# EAGLE board chaprintesting14viasben (EAGLE 6.4)
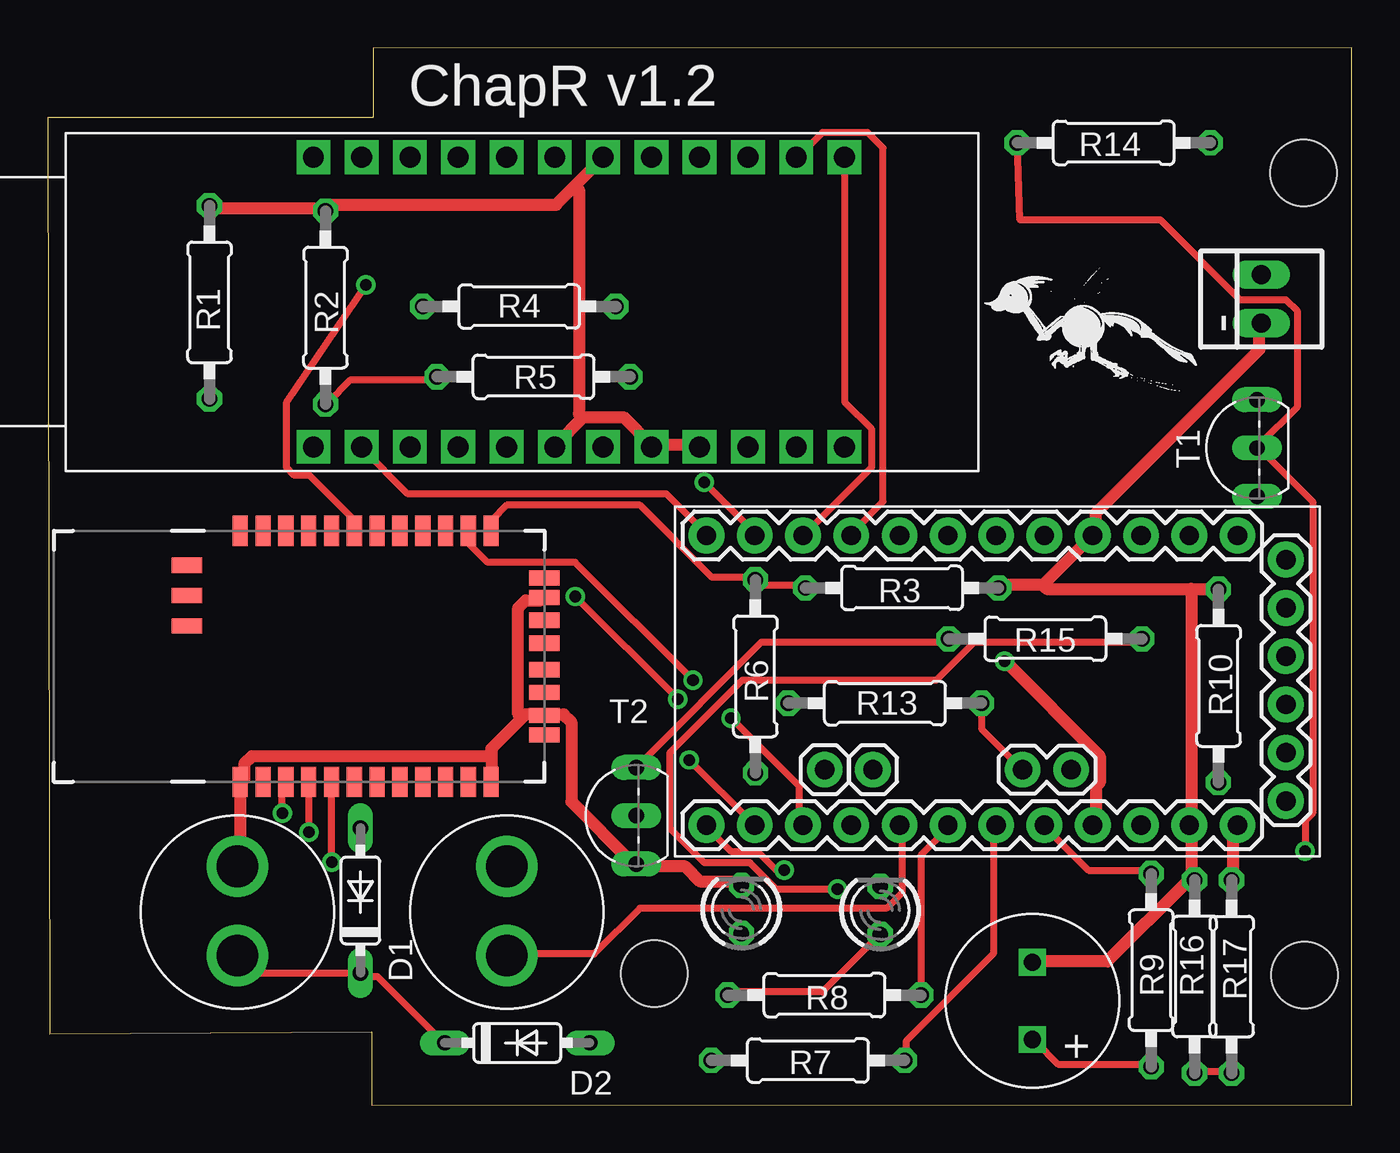
[diagram p0: board, top side]
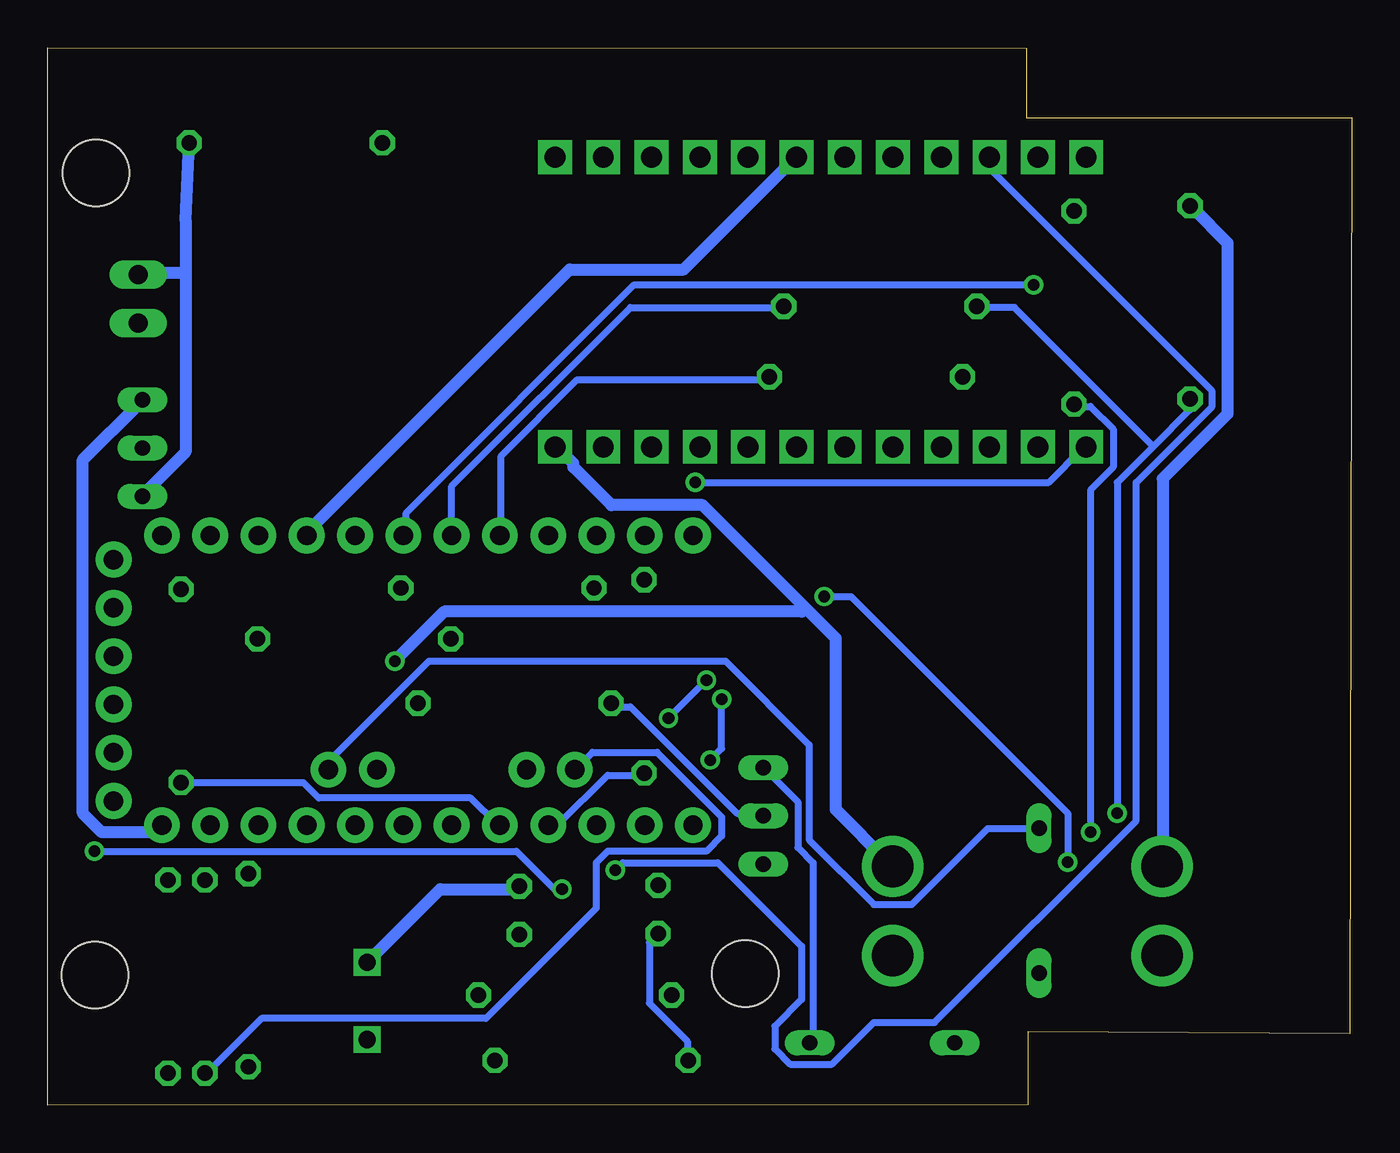
[diagram p1: board, bottom side, seen from below]

Size 68.61 x 55.65 mm. Coordinates in mm from the lower left corner, seen from the top.
Outline: 0.11,3.78 17.05,3.86 17.05,0.03 68.61,0 68.61,55.65 17.13,55.6 17.13,51.97 0,51.97 0.11,3.78
Copper layers (1*16): Top 0.035mm / dielectric 1.5mm / Bottom 0.035mm
Design rules "default *": minimum track width 10mil, minimum drill 24mil, track to track 8mil, track to pad 8mil, pad to pad 8mil, via to via 9mil, smd to smd 9mil, copper to edge 40mil, drill to drill 8mil, minimum pad ring 10mil, minimum via ring 8mil, stop-mask expansion 4mil, vias tented up to drill 0mil, thermal gap 10mil
Net classes: 0 default: width 0.381 mm; 1 GND: width 0.635 mm; 2 Supply: width 0.635 mm; 3 Main Supply: width 0.635 mm
Holes 3.5 mm at 66.07,49.05 66.11,6.84 31.92,6.94
tRestrict: area 24.3,16 to 26.8,18.5; area -0.7,15.9 to 9.5,31.2; area 30,4.9 to 34,8.9; area 64.1,4.8 to 68.1,8.8; area 64.2,47.1 to 68.2,51.1; area 24.8,28.9 to 26.5,30.7
bRestrict: area 24.3,16 to 26.8,18.5; area -0.7,16 to 9.5,31.3; area 64,4.8 to 68.2,8.8; area 64.2,47.2 to 68.3,51.1; area 29.9,5 to 34,8.9
vRestrict: area 9.5,17.4 to 25.5,29.4

## Footprints (pad centres in the part's own frame; a part is rotated, then mirrored left to right if it is on the bottom)
22-23-2021 = drill 1 long: 1 -1.27,0; 2 1.27,0
PROMINI = drill 1.016 pad 1.88: A0 6.35,-5.08; A1 6.35,-2.54; A2 6.35,0; A3 6.35,2.54; A4 3.429,1.397; A5 3.429,3.937; A6 3.429,-9.017; A7 3.429,-6.477; BLK -7.62,15.24; D2 -8.89,2.54; D3 -8.89,0; D4 -8.89,-2.54; D5 -8.89,-5.08; D6 -8.89,-7.62; D7 -8.89,-10.16; D8 -8.89,-12.7; D9 -8.89,-15.24; D10 6.35,-15.24; D11 6.35,-12.7; D12 6.35,-10.16; D13 6.35,-7.62; GND -8.89,5.08; GND2 6.35,10.16; GND3 -5.08,15.24; GRN 5.08,15.24; RAWV 6.35,12.7; RST -8.89,7.62; RST2 6.35,7.62; RXI -8.89,10.16; RXI2 0,15.24; TXO -8.89,12.7; TXO2 2.54,15.24; VCC 6.35,5.08; VCC2 -2.54,15.24
DO35-7 = drill 0.813 long: A 3.81,0; C -3.81,0
LED3MM = drill 0.813 octagon: A -1.27,0; K 1.27,0
RN41 = smd 0.8 x 1.6: 1 -6.6,-6.6; 2 -5.4,-6.6; 3 -4.2,-6.6; 4 -3,-6.6; 5 -1.8,-6.6; 6 -0.6,-6.6; 7 0.6,-6.6; 8 1.8,-6.6; 9 3,-6.6; 10 4.2,-6.6; 11 5.4,-6.6; 12 6.6,-6.6; 13 6.6,6.6; 14 5.4,6.6; 15 4.2,6.6; 16 3,6.6; 17 1.8,6.6; 18 0.6,6.6; 19 -0.6,6.6; 20 -1.8,6.6; 21 -3,6.6; 22 -4.2,6.6; 23 -5.4,6.6; 24 -6.6,6.6 | smd 1.6 x 0.8: 25 -9.4,4.8; 26 -9.4,3.2; 27 -9.4,1.6; 28 9.4,3.1; 29 9.4,-3.1; 30 9.4,-4.122; 31 9.4,-1.9; 32 9.4,-0.7; 33 9.4,0.7; 34 9.4,1.9; 35 9.4,4.122
2-PIN-PUSHBUTTON = drill 2.2 pad 3.048: P$1 -1.778,0; P$2 2.921,0
0207/10 = drill 0.813 octagon: 1 -5.08,0; 2 5.08,0
TO92-EBC = drill 0.813 long: B 0,-1.27; C 2.54,-1.27; E -2.54,-1.27
SPEAKER = drill 0.9 square: + -2.032,0; - 2.032,0
V2DIP2 = drill 1.1 pad 1.778 square: P$1 40.97,1.27; P$2 38.43,1.27; P$3 35.89,1.27; P$4 33.35,1.27; P$5 30.81,1.27; P$6 28.27,1.27; P$7 25.73,1.27; P$8 23.19,1.27; P$9 20.65,1.27; P$10 18.11,1.27; P$11 15.57,1.27; P$12 13.03,1.27; P$13 40.97,16.51; P$14 38.43,16.51; P$15 35.89,16.51; P$16 33.35,16.51; P$17 30.81,16.51; P$18 28.27,16.51; P$19 25.73,16.51; P$20 23.19,16.51; P$21 20.65,16.51; P$22 18.11,16.51; P$23 15.57,16.51; P$24 13.03,16.51

## Placement (x,y rotation side)
-  9v power  [22-23-2021]  63.84,42.42 90 top
ARDUINO  PROMINI  [PROMINI]  49.9,21.09 270 top
D1  1N4148  [DO35-7]  16.46,10.78 90 top
D2  1N4148  [DO35-7]  24.71,3.29 0 top
LED1  [LED3MM]  43.8,10.26 90 top
M2  RN42 Module  [RN41]  16.74,23.62 0 top
PB1  PUSHBUTTON  [2-PIN-PUSHBUTTON]  24.16,10.8 270 top
PB2  BUTTON  [2-PIN-PUSHBUTTON]  9.99,10.8 270 top
PWR-LED  [LED3MM]  36.5,10.31 90 top
R1  19.1k  [0207/10]  8.52,42.24 270 top
R2  19.1k  [0207/10]  14.62,41.97 270 top
R3  19.1k  [0207/10]  44.95,27.22 180 top
R4  10k  [0207/10]  24.81,42.03 0 top
R5  10k  [0207/10]  25.56,38.33 0 top
R6  10k  [0207/10]  37.23,22.57 270 top
R7  470  [0207/10]  40,2.37 0 top
R8  470  [0207/10]  40.86,5.8 0 top
R9  100  [0207/10]  58.06,7.11 90 top
R10  10k  [0207/10]  61.59,22.07 270 top
R13  10k  [0207/10]  44.05,21.16 0 top
R14  19.1k  [0207/10]  56.08,50.64 0 top
R15  1.5k  [0207/10]  52.49,24.54 180 top
R16  24K  [0207/10]  60.34,6.77 90 top
R17  24K  [0207/10]  62.28,6.77 270 top
T1  3906  [TO92-EBC]  62.35,34.58 90 top
T2  3904  [TO92-EBC]  29.7,15.24 90 top
U$2  SPEAKER  [SPEAKER]  51.8,5.5 90 top
V2DIP2  V2DIP2  [V2DIP2]  0.95,33.37 0 top

## Library data of the parts
- = con-molex; MF: MOLEX; MPN: 22-23-2021; OC_FARNELL: 1462926; OC_NEWARK: 25C3832
ARDUINO PB1 PB2 U$2 V2DIP2 = ChapR-Custom
D1 D2 = diode
LED1 PWR-LED = led
M2 = SparkFun-RF
R1-R10 R13-R17 = resistor
T1 T2 = transistor-neu-to92

## Nets
+3V3 [Supply]: M2.11
+5V [Supply]: ARDUINO.VCC PB1.P$1 V2DIP2.P$1
+9V [Main Supply]: -.2 R14.2 T1.E
GND [GND]: -.1 ARDUINO.GND ARDUINO.GND2 LED1.K M2.1 M2.12 M2.28 M2.29 PB2.P$1 PWR-LED.K R1.1 R2.1 R3.1 R10.1 R16.2 T2.E U$2.- V2DIP2.P$4 V2DIP2.P$5 V2DIP2.P$7 V2DIP2.P$18
N$1: R14.1 R15.1 T1.B
N$2: ARDUINO.D10 V2DIP2.P$22
N$3: ARDUINO.D13 R6.2
N$4: ARDUINO.D12 M2.14
N$5: ARDUINO.D11 M2.5
N$6: M2.3 R1.2 R4.1
N$7: M2.4 R2.2 R5.1
N$8: ARDUINO.D5 R5.2
N$9: M2.13 R3.2 R6.1
N$10: ARDUINO.D6 V2DIP2.P$14
N$11: ARDUINO.D7 V2DIP2.P$13
N$12: ARDUINO.D8 V2DIP2.P$12
N$13: ARDUINO.D9 V2DIP2.P$11
N$14: ARDUINO.D4 R4.2
N$15: ARDUINO.D3 M2.19
N$16: PWR-LED.A R7.1
N$17: LED1.A R8.1
N$18: ARDUINO.A2 R7.2
N$19: R9.1 U$2.+
N$20: ARDUINO.A1 R8.2
N$21: ARDUINO.A3 R9.2
N$23 [Main Supply]: ARDUINO.RAWV R17.1 T1.C
N$24: ARDUINO.A0 PB1.P$2 R10.2
N$25: D2.A R15.2 T2.C
N$26: R13.1 T2.B
N$27: D1.C D2.C PB2.P$2
N$28: V2DIP2.P$24
N$29: ARDUINO.A5 D1.A
N$30: ARDUINO.A4 R13.2
N$31: ARDUINO.A6 R16.1 R17.2

## Tracks (layer width: path | path; a pad name or v marks a point on that pad's centre or on a via)
+5V  (via drill 0.61)
  Top 0.635: v50.35,23.37 55.35,18.37 55.35,16.97 55.15,16.77 55.15,14.77 ARDUINO.VCC
  Bottom 0.635: 28.75,26.17 27.15,24.57 27.15,15.57 24.35,12.77 PB1.P$1 | 28.75,26.17 34.15,31.57 38.95,31.57 40.95,33.57 40.95,33.77 41.75,34.57 V2DIP2.P$1 | v50.35,23.37 47.75,25.97 28.95,25.97 28.75,26.17
+9V
  Bottom 0.635: 61.35,43.77 61.35,46.57 R14.2 | 61.35,43.77 61.35,34.37 63.55,32.17 T1.E | 61.35,43.77 63.75,43.77 -.2
GND
  Top 0.635: PB2.P$1 10.15,12.77 10.15,16.97 M2.1 10.35,17.17 10.35,17.97 10.75,18.37 23.35,18.37 | PWR-LED.K 36.35,11.77 34.35,11.77 33.55,12.57 31.15,12.57 T2.E 30.75,12.77 27.55,15.97 27.55,20.17 27.15,20.57 26.35,20.57 M2.29 25.95,20.57 25.15,20.57 24.95,20.37 | 23.35,18.37 23.35,18.77 24.95,20.37 | 23.35,18.37 23.35,17.17 M2.12 | M2.28 25.95,26.57 25.15,26.57 24.75,26.17 24.75,20.57 24.95,20.37 | 28.15,36.17 26.75,34.77 V2DIP2.P$7 | 28.15,36.17 30.35,36.17 31.75,34.77 V2DIP2.P$5 31.95,34.77 34.15,34.77 V2DIP2.P$4 | R1.1 8.55,47.17 14.55,47.17 R2.1 14.75,47.37 26.75,47.37 27.75,48.37 | 27.75,48.37 29.15,49.77 V2DIP2.P$18 | 28.15,36.17 27.95,36.37 27.95,48.17 27.75,48.37 | 52.35,27.37 50.15,27.37 R3.1 | 52.35,27.37 54.95,29.97 ARDUINO.GND 55.15,30.17 55.15,31.17 63.75,39.77 63.75,40.97 -.1 | 60.15,27.17 52.55,27.17 52.35,27.37 | 60.15,27.17 61.55,27.17 R10.1 | 60.15,27.17 60.15,14.97 ARDUINO.GND2 60.15,14.57 60.15,11.97 R16.2 59.95,11.77 55.75,7.57 51.95,7.57 U$2.-
  Bottom 0.635: LED1.K 43.95,11.37 47.95,11.37 51.75,7.57 U$2.- | V2DIP2.P$18 29.35,49.77 35.15,43.97 41.15,43.97 54.95,30.17 ARDUINO.GND | PB2.P$1 9.95,12.77 9.95,32.97 6.55,36.37 6.55,45.37 8.35,47.17 R1.1
N$1  (via drill 0.61)
  Top 0.381: R14.1 51.15,46.57 58.55,46.57 62.75,42.37 65.15,42.37 65.75,41.77 65.75,36.77 63.75,34.77 T1.B 63.75,34.57 66.55,31.77 66.55,15.37 66.15,14.97 v66.15,13.37 | v41.55,11.37 38.35,11.37 36.95,12.77 34.55,12.77 32.75,14.57 32.75,18.57 36.55,22.37 46.75,22.37 48.75,24.37 57.55,24.37 R15.1
  Bottom 0.381: v41.55,11.37 41.95,11.37 43.95,13.37 v66.15,13.37
N$2  (via drill 0.61)
  Top 0.381: v38.75,12.37 38.35,12.37 37.35,13.37 35.95,13.37 34.75,14.57 ARDUINO.D10
  Bottom 0.381: v38.75,12.37 38.35,12.77 33.35,12.77 28.95,8.37 28.95,5.57 30.35,4.17 30.35,2.97 29.55,2.17 27.35,2.17 25.15,4.37 21.95,4.37 11.35,14.97 11.35,32.77 7.35,36.77 7.35,37.57 18.95,49.17 18.95,49.77 V2DIP2.P$22
N$3
  Bottom 0.381: R6.2 37.35,17.37 39.15,17.37 41.75,14.77 42.15,14.77 ARDUINO.D13
N$4  (via drill 0.61)
  Top 0.381: v33.95,22.37 27.75,28.57 23.15,28.57 22.15,29.57 22.15,30.17 M2.14 | v35.95,20.37 39.55,16.77 39.55,14.77 ARDUINO.D12
  Bottom 0.381: v35.95,20.37 v33.95,22.37
N$5  (via drill 0.61)
  Top 0.381: v14.95,12.8 14.95,16.97 M2.5 | v33.15,21.37 v27.75,26.77 | v33.75,18.17 37.15,14.77 ARDUINO.D11
  Bottom 0.381: v14.95,12.8 14.95,15.37 26.35,26.77 v27.75,26.77 | v33.15,21.37 33.15,18.77 v33.75,18.17
N$6  (via drill 0.61)
  Top 0.381: v12.35,15.37 12.35,16.97 M2.3
  Bottom 0.381: v12.35,15.37 12.35,32.77 10.45,34.67 | 10.45,34.67 8.55,36.57 8.55,36.97 R1.2 | 10.45,34.67 17.75,41.97 19.55,41.97 R4.1
N$7  (via drill 0.61)
  Top 0.381: v13.75,14.37 13.75,16.97 M2.4 | R5.1 20.35,38.17 15.95,38.17 14.75,36.97 R2.2
  Bottom 0.381: v13.75,14.37 13.75,32.37 12.55,33.57 12.55,35.57 13.75,36.77 14.55,36.77 R2.2
N$8
  Bottom 0.381: R5.2 30.75,38.17 40.75,38.17 44.75,34.17 44.75,30.17 ARDUINO.D5
N$9
  Top 0.381: M2.13 23.35,30.37 23.35,30.77 24.15,31.57 31.15,31.57 34.95,27.77 37.15,27.77 R6.1 37.35,27.57 37.55,27.37 39.75,27.37 R3.2
N$10
  Top 0.381: V2DIP2.P$14 39.55,49.97 40.75,51.17 43.15,51.17 43.95,50.37 43.95,31.77 42.35,30.17 ARDUINO.D6
N$11
  Top 0.381: V2DIP2.P$13 41.95,49.77 41.95,36.97 43.35,35.57 43.35,33.57 ARDUINO.D7
N$12  (via drill 0.61)
  Top 0.381: v34.55,32.77 37.15,30.17 ARDUINO.D8
  Bottom 0.381: v34.55,32.77 15.95,32.77 14.15,34.57 V2DIP2.P$12
N$13
  Top 0.381: V2DIP2.P$11 16.55,34.57 18.95,32.17 32.55,32.17 34.55,30.17 ARDUINO.D9
N$14
  Bottom 0.381: R4.2 29.95,41.97 37.95,41.97 47.35,32.57 47.35,30.17 ARDUINO.D4
N$15  (via drill 0.61)
  Top 0.381: v16.75,43.17 12.55,36.97 12.55,33.57 12.95,33.17 13.75,33.17 15.95,30.97 15.95,30.37 M2.19
  Bottom 0.381: v16.75,43.17 37.75,43.17 49.75,31.17 49.75,30.17 ARDUINO.D3
N$16
  Bottom 0.381: R7.1 34.95,2.37 34.95,3.37 36.95,5.37 36.95,8.57 36.55,8.97 PWR-LED.A
N$17
  Top 0.381: R8.1 35.95,5.97 40.75,5.97 43.75,8.97 LED1.A
N$18
  Top 0.381: R7.2 45.15,2.37 45.15,3.37 49.75,7.97 49.75,14.57 ARDUINO.A2
N$19
  Top 0.381: R9.1 57.95,2.17 53.15,2.17 51.95,3.37 U$2.+
N$20
  Top 0.381: R8.2 45.95,5.97 45.95,13.17 47.35,14.57 ARDUINO.A1
N$21
  Top 0.381: R9.2 57.95,12.37 54.75,12.37 52.55,14.57 ARDUINO.A3
N$23
  Top 0.635: R17.1 62.35,11.97 62.35,14.37 62.55,14.57 ARDUINO.RAWV
  Bottom 0.635: T1.C 63.75,36.97 66.75,33.97 66.75,15.37 65.75,14.37 62.95,14.37 62.75,14.57 ARDUINO.RAWV
N$24
  Top 0.381: PB1.P$2 24.35,7.97 28.75,7.97 31.15,10.37 44.15,10.37 44.95,11.17 44.95,14.57 ARDUINO.A0
  Bottom 0.381: R10.2 61.55,16.97 55.15,16.97 54.35,16.17 46.35,16.17 44.95,14.77 ARDUINO.A0
N$25
  Top 0.381: R15.2 47.35,24.37 37.55,24.37 31.15,17.97 T2.C
  Bottom 0.381: D2.A 28.35,3.37 28.35,12.77 29.15,13.57 29.15,15.97 30.95,17.77 T2.C
N$26
  Bottom 0.381: T2.B 31.15,15.37 32.35,15.37 37.95,20.97 38.95,20.97 R13.1
N$27
  Top 0.381: D2.C 20.75,3.37 17.35,6.77 16.55,6.77 D1.C 16.35,6.97 10.95,6.97 10.15,7.77 PB2.P$2
N$29
  Bottom 0.381: D1.A 16.55,14.57 19.15,14.57 23.15,10.57 25.15,10.57 28.55,13.97 28.55,18.97 32.95,23.37 48.55,23.37 53.75,18.17 53.75,17.77 ARDUINO.A5
N$30
  Top 0.381: R13.2 49.15,20.97 49.15,19.77 51.15,17.77 ARDUINO.A4
N$31
  Top 0.381: R16.1 60.35,1.77 62.15,1.77 R17.2
  Bottom 0.381: R16.1 60.15,1.77 57.35,4.57 45.55,4.57 39.75,10.37 39.75,12.77 39.15,13.37 33.95,13.37 33.15,14.17 33.15,15.17 36.55,18.57 39.95,18.57 40.75,17.77 ARDUINO.A6

## Text on the board
tPlace: ChapR v1.2 | +
Reference: .26 inner support diam | .32 outer support diam | 2.4 max board width | 1.94 between outer supports edge